# Altium PCB PCB1.PcbDoc
Units mm, origin at the board's own origin, x right, y up, seen from the top; angles counter-clockwise.
Board outline 40 x 90 mm, 4 copper layers (Top Layer, Mid Layer 1, Mid Layer 2, Bottom Layer), stack 1.57 mm thick; 33 components, 16 nets, 122 pads, 103 vias.
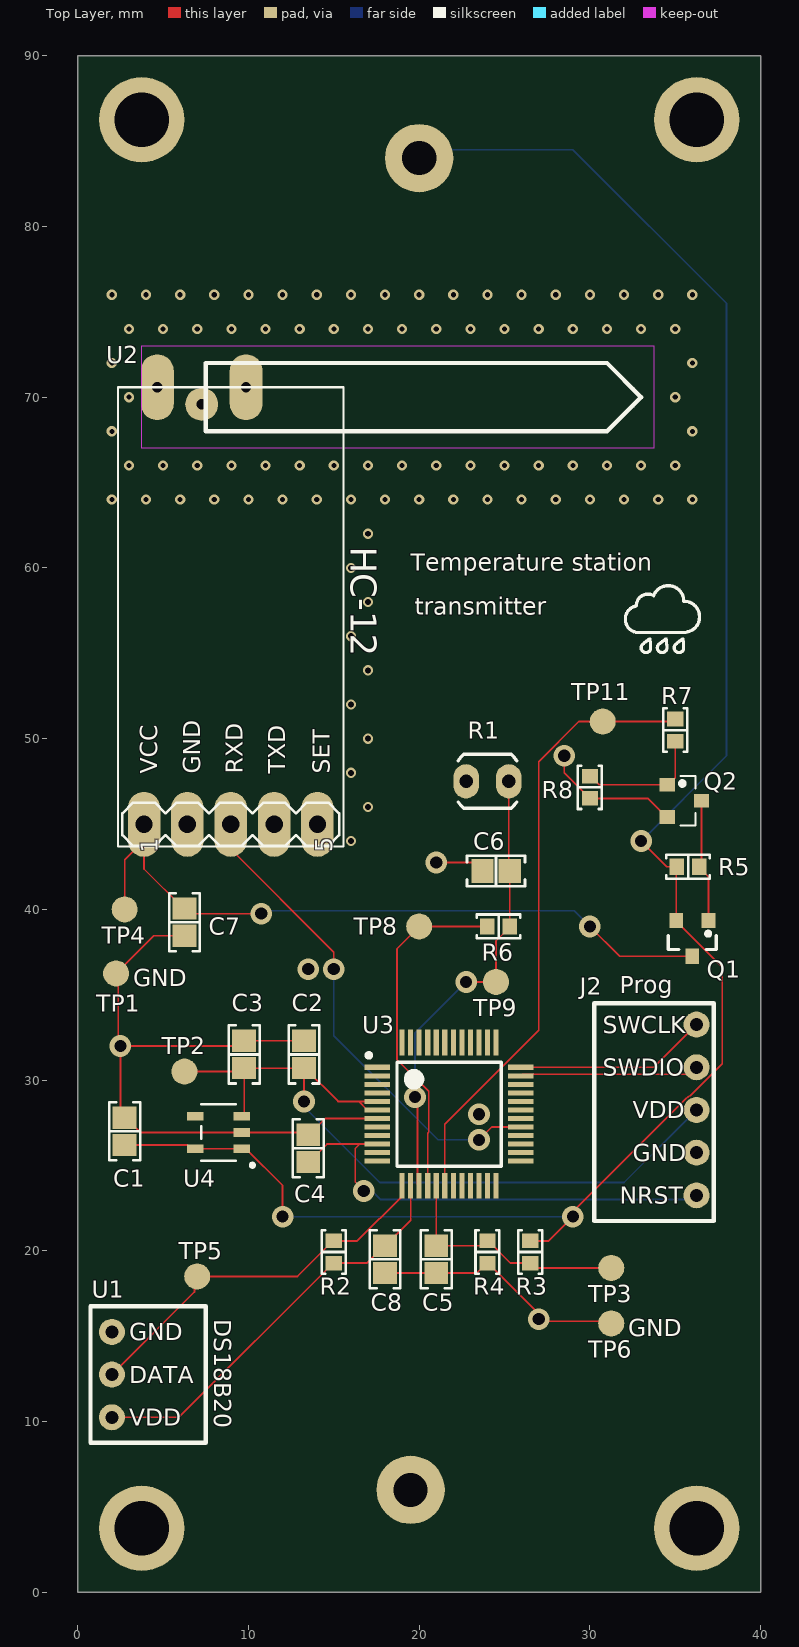
[diagram p0: Top Layer view]
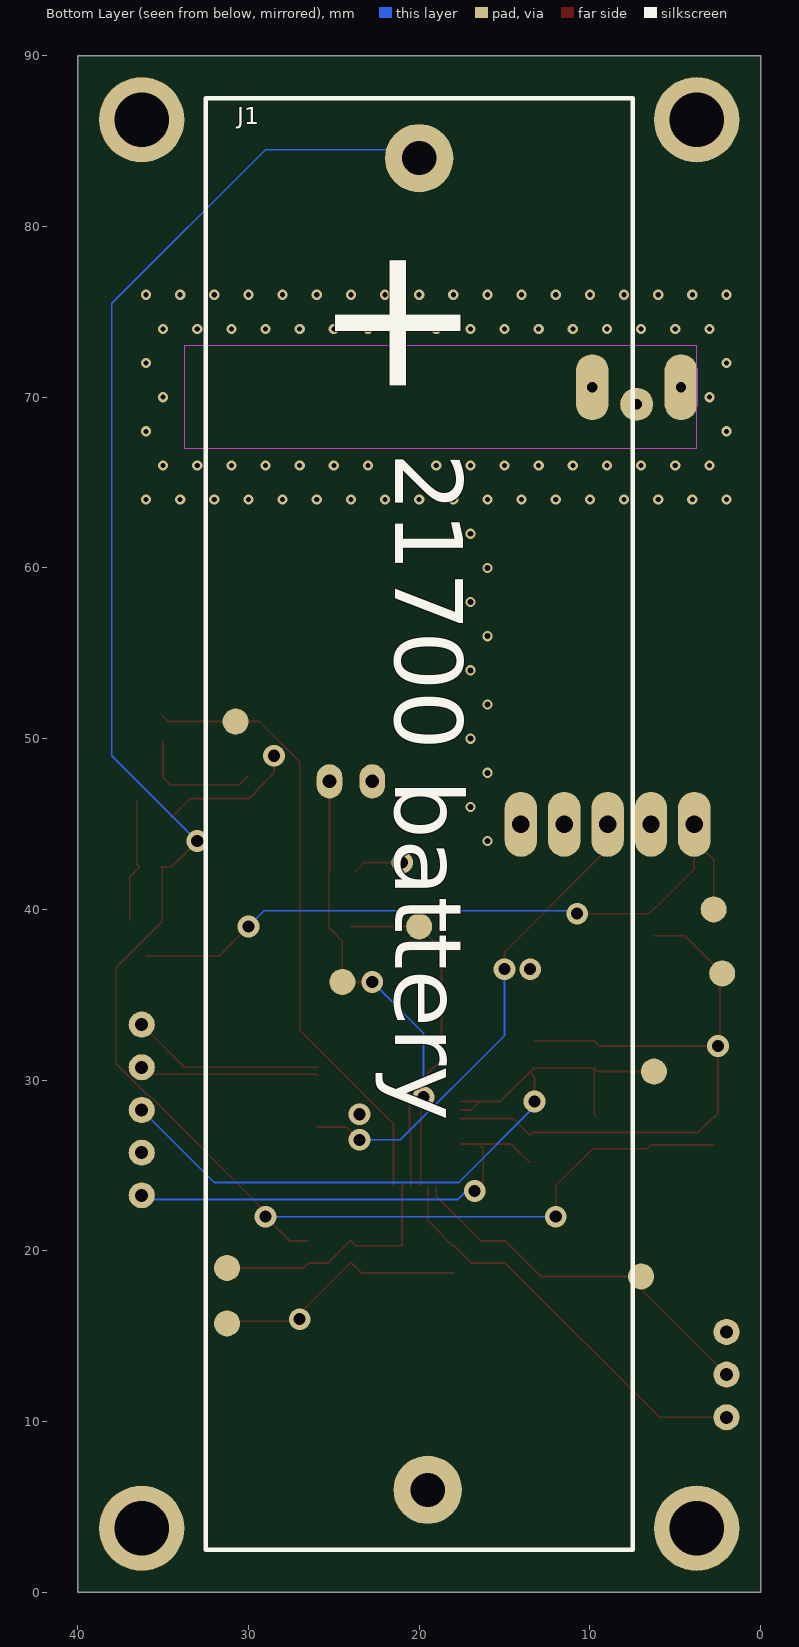
[diagram p1: Bottom Layer view, seen from below]
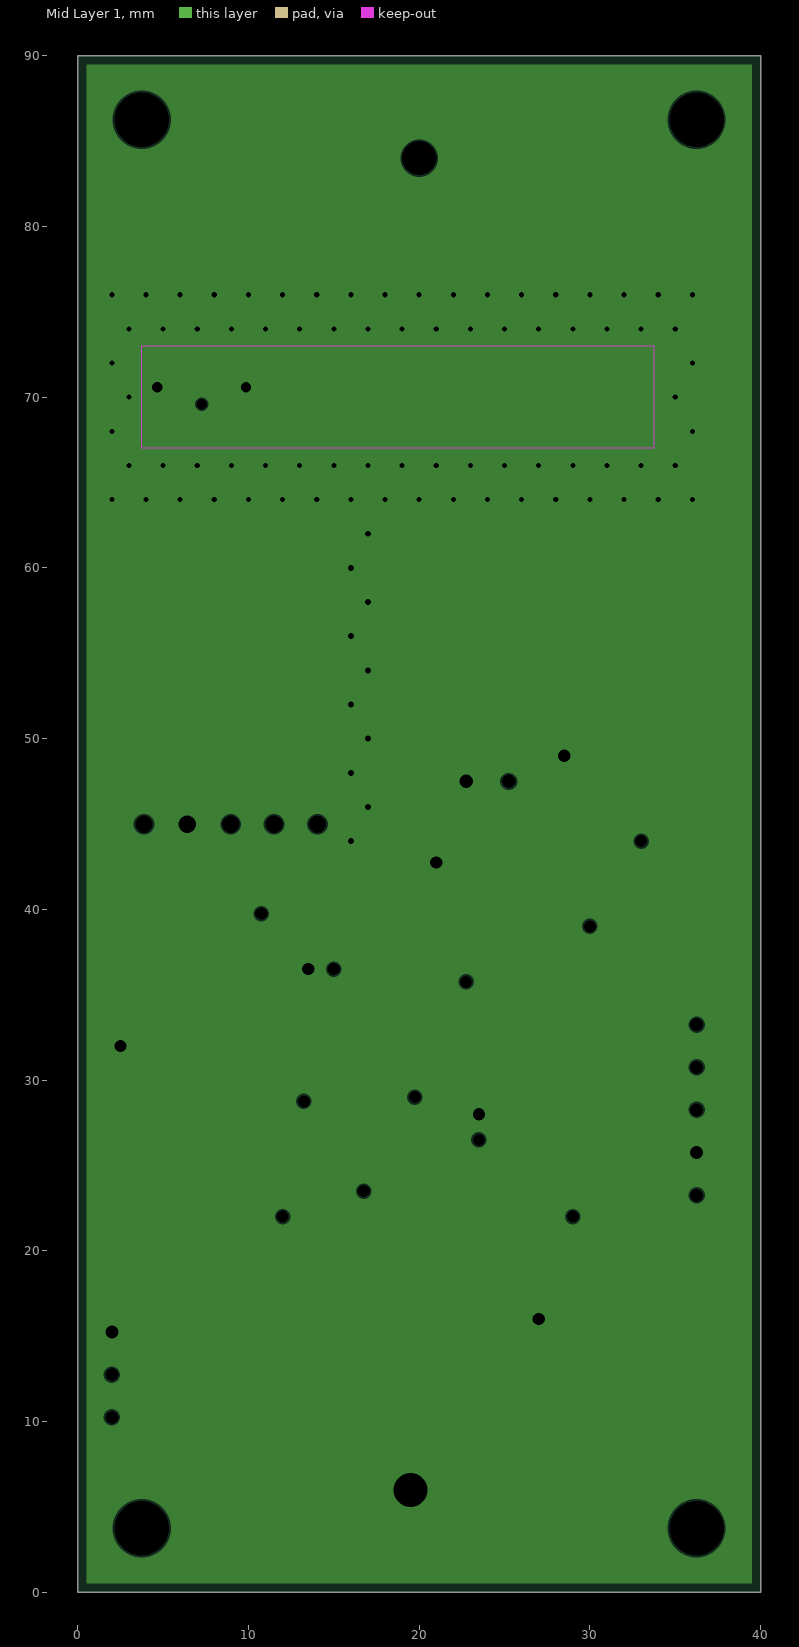
[diagram p2: Mid Layer 1, clearances drawn from the general rule]
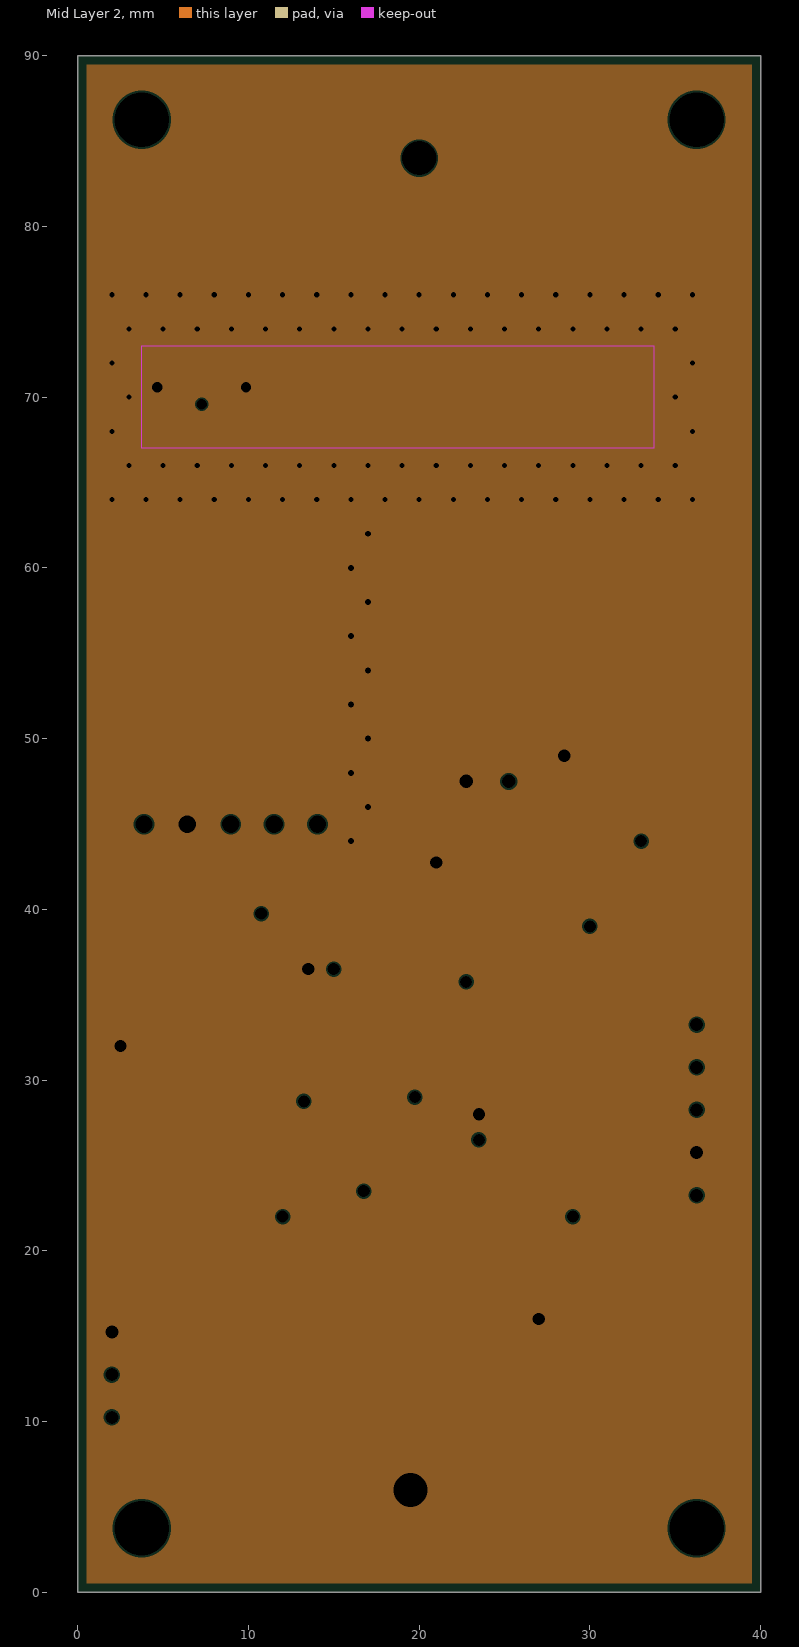
[diagram p3: Mid Layer 2, clearances drawn from the general rule]
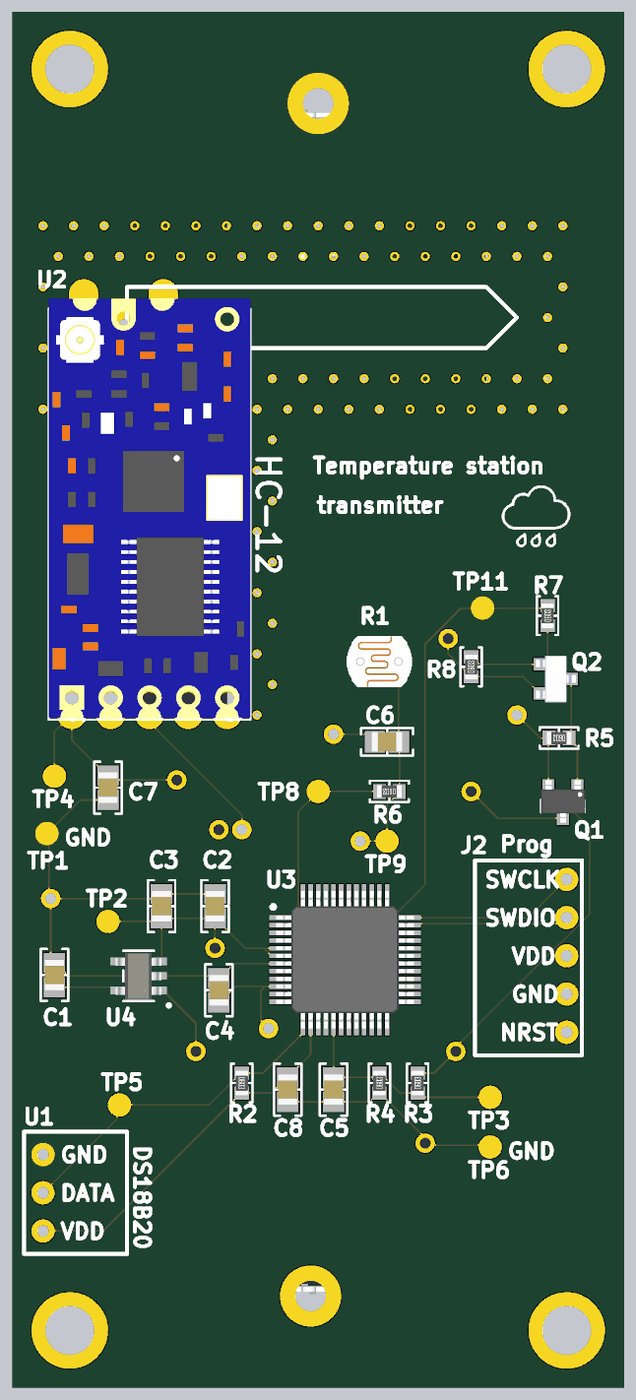
[diagram p4: 3D render of the assembled board from above, using the file's embedded part models]

## Layer stack, top to bottom
Top Solder: solder mask 0.0127, Solder Resist, Dk 3.5
Top Layer: signal copper 0.035
Dielectric 1: prepreg 0.1, PP-006, Dk 4.1
Mid Layer 1: plane copper 0.0175, net GND
CORE: dielectric 1.265, FR-4, Dk 4.8
Mid Layer 2: plane copper 0.0175, net GND
Dielectric 2: prepreg 0.1, PP-006, Dk 4.1
Bottom Layer: signal copper 0.035
Bottom Solder: solder mask 0.0127, Solder Resist, Dk 3.5

## Board outline
0,0 0,90 40,90 40,0

## Design rules (kind name [scope] priority, off if disabled: settings)
BoardOutlineClearance [All] p1: gap=0.2 ignorepadtopadclearanceinfootprint=FALSE
Clearance [All] p1: gap=0.102 ignorepadtopadclearanceinfootprint=FALSE except(0.127: Arc-Via Track-Via SMDPad-Via THPad-Via Via-Via Via-Fill Via-Poly Via-Region Via-Text; 0.25: Arc-Hole Track-Hole SMDPad-Hole THPad-Hole Via-Hole Fill-Hole Poly-Hole Region-Hole Text-Hole)
ComponentClearance [All] p1: gap=0.102 collisioncheckmode=3 verticalgap=0 showdistances=TRUE
DiffPairsRouting [All] p1: maxlimit=0.102 minlimit=0.102 mostfreqgap=0.102 toplayer_minwidth=0.102 toplayer_maxwidth=1816.048 toplayer_prefwidth=0.102 bottomlayer_minwidth=0.102 bottomlayer_maxwidth=1816.048 bottomlayer_prefwidth=0.102 maxuncoupledlength=12.7
Height [All] p1: minheight=0 maxheight=1816.048 prefheight=12.7
HoleSize [All] p1: absolutevalues=TRUE maxlimit=6.3 minlimit=0.2 maxpercent=80.000 minpercent=20.000
HoleToHoleClearance [All] p1: gap=0.25 allowstackedmicrovias=FALSE
MinimumAnnularRing [All] p1: minimumring=0.076
MinimumSolderMaskSliver [All] p1: minsoldermaskwidth=0
PlaneClearance [All] p1: clearance=0.102
PlaneConnect PlaneConnectPowerPads [InPadClass('PowerPads')] p1: planeconnectstyle=Direct reliefexpansion=0.508 reliefentries=4 reliefconductorwidth=0.254 reliefairgap=0.254
PlaneConnect [All] p2: pad.planeconnectstyle=Relief pad.reliefexpansion=0.3 pad.reliefentries=4 pad.reliefconductorwidth=0.102 pad.reliefairgap=0.102 via.planeconnectstyle=Direct via.reliefexpansion=0.3 via.reliefentries=4 via.reliefconductorwidth=0.127 via.reliefairgap=0.127
PolygonConnect PolygonConnectPowerPads [All vs (InPadClass('PowerPads'))] p1: connectstyle=Direct reliefconductorwidth=0.254 reliefentries=4 polygonreliefangle="90 Angle" airgapwidth=0.254
PolygonConnect [All] p2: thpad.connectstyle=Relief thpad.reliefconductorwidth=0.102 thpad.reliefentries=4 thpad.polygonreliefangle="90 Angle" thpad.airgapwidth=0.102 smdpad.connectstyle=Relief smdpad.reliefconductorwidth=0.102 smdpad.reliefentries=4 smdpad.polygonreliefangle="90 Angle" smdpad.airgapwidth=0.102 via.connectstyle=Direct via.reliefconductorwidth=0.127 via.reliefentries=4 via.polygonreliefangle="90 Angle" via.airgapwidth=0.127
RoutingVias [All] p1: holewidth=0.2 width=0.45 viastyle="Through Hole" minholewidth=0.2 minwidth=0.45 maxholewidth=6.3 maxwidth=6.55
SilkToSilkClearance [All] p1: silktosilkclearance=0
SilkToSolderMaskClearance [IsPad] p1: minsilkscreentomaskgap=0.102 clearancetoexposedcopper=TRUE
SolderMaskExpansion [All] p1: expansion=0.075 istentingtop=FALSE
SupplyNets "Schematic Supply Nets" [InNet('GND')] p1: voltage=0.000
Width [All] p1: maxlimit=1816.048 minlimit=0.102 preferedwidth=0.102
20 further rules are at their usual default settings.

## Components (designator, comment, footprint, x,y, rotation, side; value= is the part's Value field where it differs from the comment)
C1 "1uF" "CAP 0805_2012" 2.75,27 r270 top value=1µF
C2 "100nF" "CAP 0805_2012" 13.25,31.5 r270 top value=1µF
C3 "1uF" "CAP 0805_2012" 9.75,31.5 r270 top value=1µF
C4 "100nF" "CAP 0805_2012" 13.5,26 r270 top value=1µF
C5 "100nF" "CAP 0805_2012" 21,19.5 r90 top value=1µF
C6 "100nF" "CAP 0805_2012" 24.5,42.25 r0 top value=1µF
C7 "10uF" "CAP 0805_2012" 6.25,39.25 r90 top value=1µF
C8 "100nF" "CAP 0805_2012" 18,19.5 r90 top value=1µF
J1 "Batt Holder" 21700_batt_holder 8.5,86.5 r270 bottom
J2 "Prog_header" Prog_header 36.25,33.25 r270 top
Q1 "AO3401 A19T SOT-23" "AO3401 A19T SOT-23" 36.269,38.112 r90 top
Q2 "2N7002" 2N7002 35.5,46.5 r0 top
R1 "NSL-19M51" "ADVANCED PHOTONIX NSL-19M51" 24,47.5 r0 top
R2 "4.7k" "RES 0603_1608" 15,19.93 r270 top value="49.9 kOhms"
R3 "1M" "RES 0603_1608" 26.5,19.93 r90 top value="49.9 kOhms"
R4 "1M" "RES 0603_1608" 24,19.93 r90 top value="49.9 kOhms"
R5 "100K" "RES 0603_1608" 35.75,42.5 r180 top value="49.9 kOhms"
R6 "10k" "RES 0603_1608" 24.65,39 r180 top value="49.9 kOhms"
R7 "1K" "RES 0603_1608" 35,50.5 r90 top value="49.9 kOhms"
R8 "100K" "RES 0603_1608" 30,47.15 r90 top value="49.9 kOhms"
TP1 "TP" TP#1 2.25,36.25 r0 top
TP2 "TP" TP#2 6.25,30.5 r90 top
TP3 "TP" TP#2 31.25,19 r90 top
TP4 "TP" TP#2 2.75,40 r90 top
TP5 "TP" TP#2 7,18.5 r90 top
TP6 "TP" TP#2 31.25,15.75 r90 top
TP8 "TP" TP#2 20,39 r90 top
TP9 "TP" TP#2 24.5,35.75 r180 top
TP11 "TP" TP#1 30.75,51 r0 top
U1 "DS18B20" DS18B20 2,15.25 r270 top
U2 "HC-12" HC-12 9,57 r90 top
U3 "STM32C031C4T6" QFP50P900X900X160-48N 21.75,28 r0 top
U4 "TPS7A0230PDBVR" TPS7A0230PDBVR 8.25,27 r180 top

## Footprints (in the part's own frame and the unit in brackets; to place one, negate y for a bottom-side part, rotate by r counter-clockwise, add the part's x,y. Pads: shape width x height; smd on the part's side, far side on the other; paste and mask are expansions set on the pad)
2N7002 [mm] "N-Channel 60 V 115mA 225mW Surface Mount SOT-23"
  rect 0.9x0.8 smd paste+0 mask+0.102: 1(-0.96,0.806) 2(-0.96,-1.094) 3(1.04,-0.144)
  silkscreen extent -0.21,-1.59 0.69,1.31, body extent -1.26,-1.66 1.34,1.38, height 1.3
21700_batt_holder [mm]
  round 4 hole 2 mask-2539.97: 1(2.5,-11.5)
  round 4 hole 2: 2(80.5,-11)
  silkscreen extent -1,-24 84,1, body extent 0.56,-22.5 82.75,0.77, height 24.12
"ADVANCED PHOTONIX NSL-19M51" [mm] "4mm Photoresistor"
  oval 1.5x2 hole 0.8: 1(-1.25,0) 2(1.25,0)
  silkscreen extent -1.72,-1.58 1.72,1.58, body extent -2.15,-1.65 2.15,1.65, height 1.8
"AO3401 A19T SOT-23" [mm] "P-channel MOSFET"
  rect 0.9x0.8 smd: 1(1.238,-0.681) 2(1.238,1.219) 3(-0.862,0.269)
  silkscreen extent -0.46,-1.13 0.57,1.67, body extent -1.16,-1.2 1.64,1.7, height 1.25
"CAP 0805_2012" [mm] "Chip Capacitor, 2-Leads, Body 2.00x1.20mm, IPC Medium Density"
  rect 1.3x1.4 smd: 1(-0.8,0) 2(0.8,0)
  silkscreen extent -1.7,-0.9 1.7,0.9, body extent -1,-0.64 1,0.64, height 1.26
DS18B20 [mil]
  round 60 hole 30 mask-99999: 1(0,0)
  round 60 hole 30: 2(98.43,0) 3(196.85,0)
  silkscreen extent -59,-49 256,217
HC-12 [mil]
  oval 150x75 hole 40: 1(-473.11,201.46) 2(-473.11,101.46) 3(-473.11,1.46) 4(-473.11,-98.54) 5(-473.11,-198.54)
  oval 152x76 hole 23.62: 6(534.76,170.75) 7(534.76,-33.98)
  round 76 hole 23.62: 8(495.39,68.39)
  silkscreen extent -524,-258 535,261, body extent -518,-259 561,261, height 157
Prog_header [mil] "SWDIO programming header"
  round 60 hole 30: 1(0,0) 2(98.43,0) 3(196.85,0) 4(295.28,0) 5(393.7,0)
  silkscreen extent -49,-236 453,39
QFP50P900X900X160-48N [mm] "QFP, 0.50mm pitch, square, 12 pin X 12 pin, 7.00mm X 7.00mm X 1.60mm Body, IPC Medium Density"
  rect 1.5x0.3 smd: 1(-4.2,2.75) 2(-4.2,2.25) 3(-4.2,1.75) 4(-4.2,1.25) 5(-4.2,0.75) 6(-4.2,0.25) 7(-4.2,-0.25) 8(-4.2,-0.75) 9(-4.2,-1.25) 10(-4.2,-1.75) 11(-4.2,-2.25) 12(-4.2,-2.75) 25(4.2,-2.75) 26(4.2,-2.25) 27(4.2,-1.75) 28(4.2,-1.25) 29(4.2,-0.75) 30(4.2,-0.25) 31(4.2,0.25) 32(4.2,0.75) 33(4.2,1.25) 34(4.2,1.75) 35(4.2,2.25) 36(4.2,2.75)
  rect 0.3x1.5 smd: 13(-2.75,-4.2) 14(-2.25,-4.2) 15(-1.75,-4.2) 16(-1.25,-4.2) 17(-0.75,-4.2) 18(-0.25,-4.2) 19(0.25,-4.2) 20(0.75,-4.2) 21(1.25,-4.2) 22(1.75,-4.2) 23(2.25,-4.2) 24(2.75,-4.2) 37(2.75,4.2) 38(2.25,4.2) 39(1.75,4.2) 40(1.25,4.2) 41(0.75,4.2) 42(0.25,4.2) 43(-0.25,4.2) 44(-0.75,4.2) 45(-1.25,4.2) 46(-1.75,4.2) 47(-2.25,4.2) 48(-2.75,4.2)
  silkscreen extent -4.82,-3.05 3.05,3.57, body extent -4.5,-4.5 4.5,4.5, height 1.6
"RES 0603_1608" [mm] "Chip Resistor, 2-Leads, Body 1.60x0.80mm, IPC Medium Density"
  rect 0.85x0.95 smd: 1(-0.65,0) 2(0.65,0)
  silkscreen extent -1.27,-0.7 1.27,0.7, body extent -0.8,-0.4 0.8,0.4, height 0.45
TP#1 [mil]
  round 60 all layers, no hole mask+0: 1(0,0)
TP#2 [mil]
  round 60 all layers, no hole: 1(0,0)
TPS7A0230PDBVR [mm] "Package/Case: SOT-23-5 3V"
  rect 0.972x0.508 smd paste+0 mask+0: 1(-1.361,1.015) 2(-1.361,0.065) 3(-1.361,-0.885) 4(1.363,-0.885) 5(1.363,1.015)
  silkscreen extent -2.06,-1.59 1,2.07, body extent -1.49,-1.44 1.51,1.61, height 1.45

## Part data
C1 C2 C3 C4 C5 C6 C7 C8: library part MM05ZC105KCZ2A, "SMT Capacitor", Capacitance=1µF, Device Package="0805 (2012 Metric)", manufacturer="AVX Corporation", Operating Temperature="-55°C ~ 125°C", Supplier Part Number 1=478-10611-1-ND, Temperature Coefficient=X7R, Tolerance=±10%, Voltage - Rated=10V, Applications="Medical, Non-Critical", componentlink1description=Datasheet, componentlink1url=http://datasheets.avx.com/AVX-MM.pdf, componentlink2description="DigiKey Link", componentlink2url=http://digikey.com/product-detail/en/avx-corporation/MM05ZC105KCZ2A/478-10611-1-ND/7344872, lastupdated="02/09/2020 01:04:42", Lifecycle Status=Active, Minimum Order=1, Mounting Type="Surface Mount, MLCC", Package / Case="0805 (2012 Metric)", packaging=TapeAndReel, Part Number=MM05ZC105KCZ2A, Part Status=Active, partid=2439, price=0.50, series=MM, Size / Dimension="0.079\" L x 0.049\" W (2.01mm x 1.25mm)", Supplier 1=DigiKey, Thickness (Max)="0.029\" (0.74mm)"
J1: library part 21700_SingleCell, "21700 battery holder"
Q1: "P-Channel MOSFET"
Q2: "N-channel MOSFET"
R1: "PHOTOCELL", Cell Resistance (Min) @ Dark="20 MOhms @ 10 s", Cell Resistance @ Illuminance="20 ~ 100kOhms @ 10 lux", Device Package=Radial, manufacturer="Advanced Photonix", Operating Temperature="-60°C ~ 75°C (TA)", Supplier Device Package=TO-18, Supplier Part Number 1=NSL-19M51-ND, Voltage - Max=100Vpk, componentlink1description=Datasheet, componentlink1url=https://lunainc.com/wp-content/uploads/2016/06/NSL-19M51.pdf, componentlink2description="DigiKey Link", componentlink2url=https://www.digikey.com/en/products/detail/advanced-photonix/NSL-19M51/5039794, lastupdated="03/03/2022 12:53:42", Lifecycle Status=Active, Minimum Order=1, Mounting Type="Through Hole", Package / Case=Radial, packaging=Bulk, Part Number=NSL-19M51, Part Status=Active, price=0.61, series=-, Supplier 1=DigiKey, Wavelength=550nm
R2 R3 R4 R5 R6 R7 R8: library part RNCS0603BKE49K9, "RES 49.9K OHM 0.1% 1/16W 0603", Device Package="0603 (1608 Metric)", manufacturer="Stackpole Electronics Inc", Operating Temperature="-55°C ~ 155°C", Power (Watts)="0.063W, 1/16W", Ratings=AEC-Q200, Resistance="49.9 kOhms", Supplier Device Package=0603, Supplier Part Number 1=RNCS0603BKE49K9CT-ND, Temperature Coefficient=±25ppm/°C, Tolerance=±0.1%, componentlink1description=Datasheet, componentlink1url=https://www.seielect.com/catalog/sei-rncs_rnch.pdf, componentlink2description="DigiKey Link", componentlink2url=https://www.digikey.com/en/products/detail/stackpole-electronics-inc/RNCS0603BKE49K9/1800040, Composition="Thin Film", Features="Anti-Corrosive, Automotive AEC-Q200, Moisture Resistant", Height - Seated (Max)="0.022\" (0.55mm)", lastupdated="09/02/2024 20:43:37", Lifecycle Status=Active, Minimum Order=1, Number of Terminations=2, Package / Case="0603 (1608 Metric)", packaging=TapeAndReel, Part Number=RNCS0603BKE49K9, Part Status=Active, partid=4842, price=0.06, series=RNCS, Size / Dimension="0.061\" L x 0.031\" W (1.55mm x 0.80mm)", Supplier 1=DigiKey
U1: "Temp senspr sealed detached."
U3: "MCU"

## Free pads (board coordinates)
  round 5 hole 3.2 unplated: 16(3.75,86.25) 16(3.75,3.75) 16(36.25,3.75) 16(36.25,86.25)

## Via types
v1: diameter 0.6, hole 0.3, Top Layer to Bottom Layer, 76 vias
v2: diameter 1.27, hole 0.711, Top Layer to Bottom Layer, 17 vias
v3: diameter 0.6, hole 0.35, Top Layer to Bottom Layer, 10 vias

## Nets (pads, with @x,y where several pads share a name; then routed paths per layer and width w, separated by ;. In a path a pad name is that pad's centre, name@x,y a point inside that pad or via, vN(x,y) a via of type N, cw(c..) or ccw(c..) an arc to the next point about the centre after c; other vN are vias at no path point)
B_LEVEL: C5.2 R3.1 R4.2 TP3.1 U3.17 | length 14.5
  Top Layer w0.102: U3.17@20.95,23.85 U3.17 C5.2 23.72,20.3 R4.2 ; R4.2@24.05,20.58 25.35,19.28 R3.1 26.78,19 TP3.1
BATT: C1.2 J1.1 Q1.2 R3.2 R5.2 U4.1 U4.5 | length 115.5
  Top Layer w0.102: C1.2 6.439,26.2 6.654,25.985 U4.5 9.844,25.985 12,23.829 v2(12,22) ; R3.2 27.58,20.58 v2(29,22) 29,22.293 35.615,28.909 35.621,28.914 ccw(c35.558,28.994) 35.625,28.917 ccw(c35.558,28.994) 35.627,28.919 cw(c36.25,28.25) 35.879,29.086 37.75,30.957 37.75,36.6 35.05,39.3 Q1.2 35.05,42.45 R5.2 34.5,42.5 v2(33,44)
  Bottom Layer w0.102: v2(12,22) v2(29,22) ; J1.1@20,84.5 29,84.5 38,75.5 38,49 v2(33,44)
DS18B20_SW: C8.2 R2.2 U1.3 U3.14 | length 24.3
  Top Layer w0.102: U1.3 5.92,10.25 14.95,19.28 R2.2 16.93,19.28 17.95,20.3 C8.2 18.05,20.3 18.649,20.899 18.649,20.949 19.5,21.8 U3.14
GND: C1.1 C2.1 C3.1 C4.1 C5.1 C6.1 C7.1 C8.1 J1.2 J2.4 Q2.2 R1.1 R4.1 R8.1 TP1.1 TP6.1 U1.1 U2.2 U2.6 U2.7 U3.7 U4.2 | length 66.2
  Top Layer w0.102: C7.1 4.45,38.45 TP1.1 2.375,36.125 2.375,32.125 v2(2.5,32) ; C2.1 C3.1 9.45,32 v2(2.5,32) ; U3.7 14.5,27.75 13.55,26.8 C4.1 13.365,26.935 U4.2 3.665,26.935 2.8,27.8 C1.1 2.5,28.05 v2(2.5,32) ; C8.1 C5.1 23.37,18.7 23.95,19.28 R4.1 24.05,19.28 26.776,16.554 26.776,16.224 v2(27,16) 27.125,15.875 31.125,15.875 TP6.1 ; v2(21,42.75) 23.2,42.75 C6.1 ; v2(28.5,49) 28.5,48 29.576,46.924 29.576,46.874 29.95,46.5 R8.1 33.396,46.5 34.49,45.406 Q2.2
  other v1: 2,64 4,64 6,64 8,64 10,64 12,64 14,64 16,64 18,64 20,64 22,64 24,64 26,64 28,64 30,64 32,64 34,64 36,64 3,66 5,66 7,66 9,66 11,66 13,66 15,66 17,66 19,66 21,66 23,66 25,66 27,66 29,66 31,66 33,66 35,66 2,68 36,68 3,70 35,70 2,72 36,72 3,74 5,74 7,74 9,74 11,74 13,74 15,74 17,74 19,74 21,74 23,74 25,74 27,74 29,74 31,74 33,74 35,74 2,76 4,76 6,76 8,76 10,76 12,76 14,76 16,76 18,76 20,76 22,76 24,76 26,76 28,76 30,76 32,76 34,76 36,76
  other v2: 23.5,28 13.5,36.5
  other v3: 16,44 17,46 16,48 17,50 16,52 17,54 16,56 17,58 16,60 17,62
HC-12_SW: R7.2 TP11.1 U3.18 | length 36.2
  Top Layer w0.102: U3.18 21.5,27.416 27,32.916 27,48.649 29.351,51 TP11.1 34.7,51 R7.2@35,51.3
HC-12_VCC: C7.2 Q1.3 TP4.1 U2.1 | length 42.1
  Top Layer w0.102: TP4.1 2.75,42.898 3.633,43.781 U2.1@3.633,44.733 ; U2.1 3.883,42.367 6.2,40.05 C7.2 6.55,39.75 v2(10.75,39.75) ; v2(30,39) 31.75,37.25 Q1.3
  Bottom Layer w0.102: v2(10.75,39.75) 10.914,39.914 29.086,39.914 v2(30,39)
LDR: C6.2 R1.2 R6.1 TP9.1 U3.15 | length 27.1
  Top Layer w0.102: v2(19.75,29) 19.901,28.849 19.901,23.899 U3.15 ; v2(22.75,35.75) TP9.1 24.5,38.15 25.3,38.95 R6.1 C6.2 25.25,42.3 R1.2
  Bottom Layer w0.102: v2(19.75,29) 19.75,32.75 v2(22.75,35.75)
LDR_SW: R6.2 TP8.1 U3.16 | length 20.5
  Top Layer w0.102: U3.16 20.5,26.887 20.563,26.949 20.563,29.337 18.698,31.202 18.698,37.698 TP8.1 R6.2
NetQ1_1: Q1.1 Q2.3 R5.1 | length 7.3
  Top Layer w0.102: Q2.3 36.54,42.64 R5.1 36.4,42.45 36.95,41.9 Q1.1
NetQ2_1: Q2.1 R7.1 R8.2 | length 7.5
  Top Layer w0.102: R8.2 30.05,47.8 30.544,47.306 Q2.1 ; Q2.1@34.59,47.306 35,47.716 R7.1
NRST: C4.2 J2.5 U3.10 | length 27.1
  Top Layer w0.102: C4.2 13.55,25.2 14.6,26.25 16.507,26.25 ; v2(16.75,23.5) 16.75,23.529 16.25,24.029 16.25,25.993 16.31,26.052 16.507,26.25 ; U3.10 16.507,26.25
  Bottom Layer w0.102: v2(16.75,23.5) 16.878,23.628 17.122,23.628 17.75,23 J2.5@36,23
PWR: C2.2 C3.2 J2.3 TP2.1 U3.5 U3.6 U4.3 | length 44.7
  Top Layer w0.102: TP2.1 9.55,30.5 C3.2 ; U4.3 9.75,28.024 C3.2 ; v2(13.25,28.75) 13.25,30.2 C2.2@13.5,30.45 ; C2.2 C3.2 ; C2.2@13.3,30.7 15.25,28.75 16.45,28.75 ; U3.6 16.95,28.25 16.45,28.75 ; U3.5 16.45,28.75
  Bottom Layer w0.102: v2(13.25,28.75) 13.25,28.434 17.684,24 32,24 J2.3@36,28
SWCLK: J2.1 U3.36 | length 11
  Top Layer w0.102: U3.36 33.75,30.75 J2.1@36,33
SWDIO: J2.2 U3.35 | length 10.2
  Top Layer w0.102: U3.35 26.049,30.349 35.849,30.349 J2.2@36,30.5
TEMP: R2.1 TP5.1 U1.2 U3.13 | length 22.4
  Top Layer w0.102: U1.2 6.836,17.586 6.836,18.336 TP5.1 12.87,18.5 14.95,20.58 R2.1 16.38,20.58 19,23.2 U3.13
TX: U2.3 U3.29 | length 28.5
  Top Layer w0.102: U2.3@8.713,44.733 8.713,43.781 15,37.494 v2(15,36.5) ; v2(23.5,26.5) 24.25,27.25 U3.29
  Bottom Layer w0.102: v2(15,36.5) 15,32.601 21.101,26.5 v2(23.5,26.5)
pads on no net: U2.4 U2.5 U2.8 U3.1 U3.2 U3.3 U3.4 U3.8 U3.9 U3.11 U3.12 U3.19 U3.20 U3.21 U3.22 U3.23 U3.24 U3.25 U3.26 U3.27 U3.28 U3.30 U3.31 U3.32 U3.33 U3.34 U3.37 U3.38 U3.39 U3.40 U3.41 U3.42 U3.43 U3.44 U3.45 U3.46 U3.47 U3.48 U4.4

## Polygon pours and split planes (outlines as drawn)
GND on Mid Layer 1 (split plane): 39.49,0.51 0.51,0.51 0.51,89.49 39.49,89.49
GND on Mid Layer 2 (split plane): 39.49,0.51 0.51,0.51 0.51,89.49 39.49,89.49

## Keep-outs
Keep-Out Layer:
  region: 3.75,73 33.75,73 33.75,67 3.75,67

## Silkscreen, mask and mechanical layers (free items; w line width, h text height)
Top Overlay:
  drawing of 12 lines, arcs and shapes, not listed
  text "HC-12" at 16.004,61.246 h1.52 r270
  text "Temperature station" at 19.504,59.837 h1
  text "transmitter" at 19.754,57.254 h1
  text "GND" at 3.254,35.504 h1
  text "GND" at 32.254,15.004 h1
Mechanical 1:
  circle w0.254: c3.75,86.25 r3.01
  circle w0.254: c36.25,86.25 r3.01
  circle w0.254: c36.25,3.75 r3.01
  circle w0.254: c3.75,3.75 r3.01

## Text inside footprints (layer, text, board x,y; h text height)
J1: Bottom Overlay "21700 battery" at 21.413,66.746 h4 r90; Bottom Overlay "+" at 24.912,79.246 h10 r90
J2: Top Overlay "Prog" at 31.754,35.087 h1; Top Overlay "SWDIO" at 30.754,30.254 h1; Top Overlay "SWCLK" at 30.754,32.754 h1; Top Overlay "VDD" at 32.504,27.754 h1; Top Overlay "GND" at 32.504,25.254 h1; Top Overlay "NRST" at 31.754,22.754 h1
U1: Top Overlay "VDD" at 3.004,9.754 h1; Top Overlay "DATA" at 3.004,12.254 h1; Top Overlay "GND" at 3.004,14.754 h1
U2: Top Overlay "1" at 4.678,43.304 h1 r90; Top Overlay "5" at 14.918,43.332 h1 r90; Top Overlay "VCC" at 4.663,47.953 h1 r90; Top Overlay "GND" at 7.163,47.953 h1 r90; Top Overlay "RXD" at 9.663,47.953 h1 r90; Top Overlay "TXD" at 12.163,47.953 h1 r90; Top Overlay "SET" at 14.763,47.953 h1 r90